# Altium PCB DCCBooster.PcbDoc
Units mil, origin at the board's own origin, x right, y up, seen from the top; angles counter-clockwise.
Board outline 6000 x 4000 mil, 2 copper layers (Top Layer, Bottom Layer); 45 components, 35 nets, 129 pads, 12 vias.
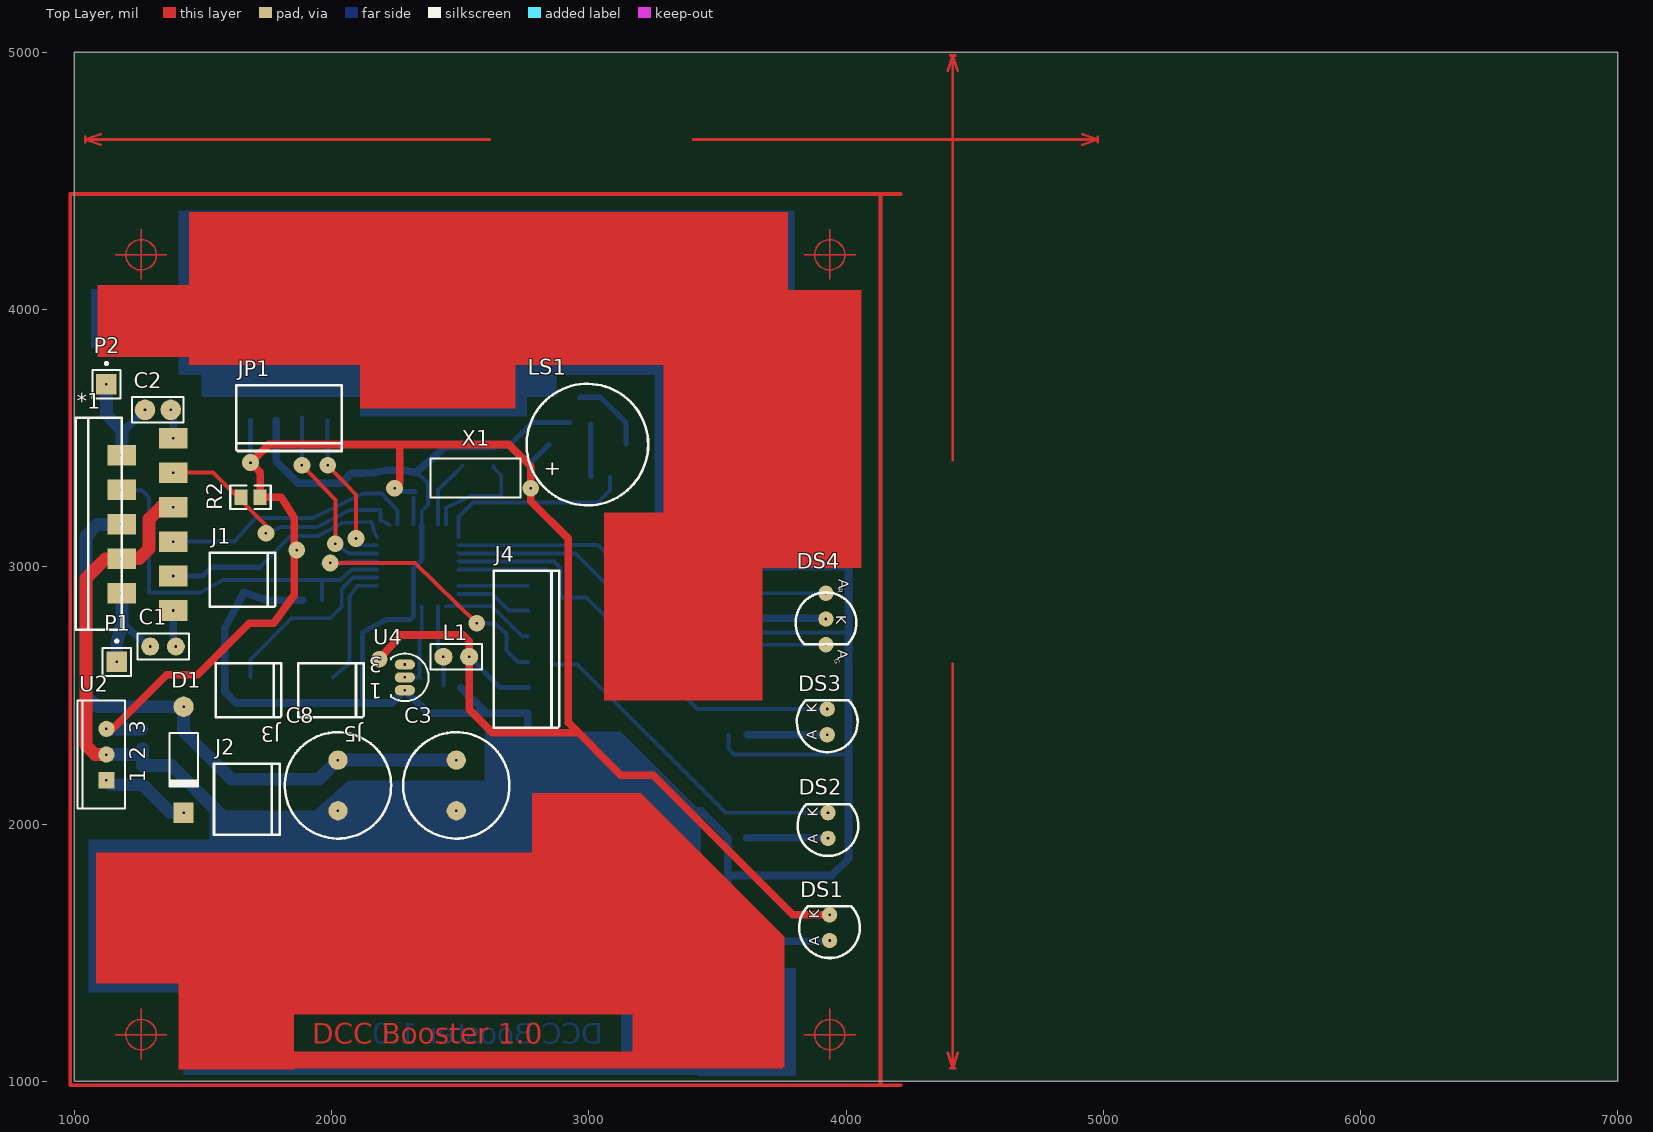
[diagram p0: Top Layer view]
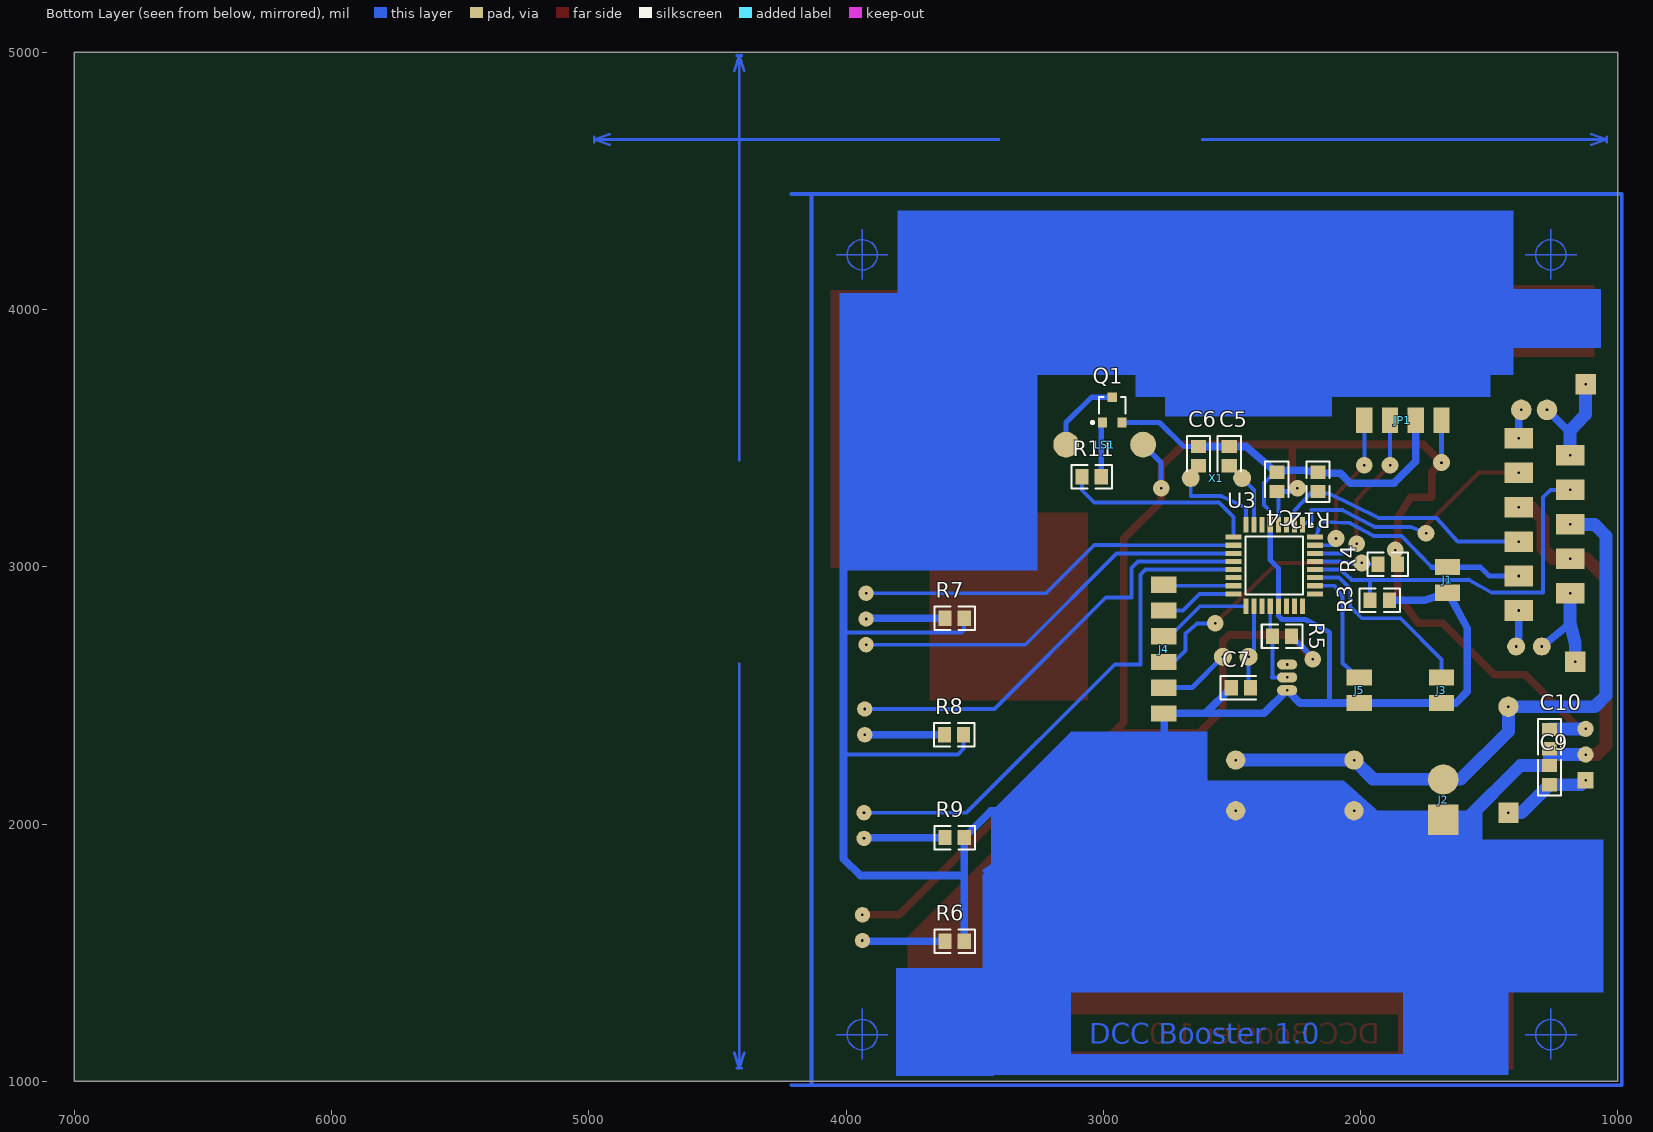
[diagram p1: Bottom Layer view, seen from below]

## Layer stack, top to bottom
Top Layer: signal copper 1.4
Dielectric: dielectric 12.6, FR-4, Dk 4.8
Bottom Layer: signal copper 1.4

## Board outline
1000,1000 7000,1000 7000,5000 1000,5000

## Design rules (kind name [scope] priority, off if disabled: settings)
Clearance [All] p1: gap=10
ComponentClearance [All] p1: gap=10 collisioncheckmode=0
PolygonConnect [All] p1: connectstyle=Relief reliefconductorwidth=10 reliefentries=4 polygonreliefangle="90 Angle"
RoutingLayers [All] p1: top layer=Horizontal bottom layer=Vertical
RoutingVias [All] p1: holewidth=28 width=50 viastyle="Through Hole" minholewidth=28 minwidth=50 maxholewidth=28 maxwidth=50
SolderMaskExpansion [All] p1: expansion=4
TestPointUsage [All] p1: valid=0 allowmultiple=FALSE
Testpoint [All] p1: side=15 testpointundercomponent=TRUE minsize=40 maxsize=100 preferedsize=60 minholesize=0 maxholesize=40 preferedholesize=32 testpointgrid=1 style=1023 order=-539222988
Width [All] p1: maxlimit=100 minlimit=15 preferedwidth=20 toplayer_prefwidth=30 bottomlayer_prefwidth=30 minimp=50.000000 maximp=50.000000 favimp=50.000000
16 further rules are at their usual default settings.

## Classes and differential pairs
component class DCCBooster: *1 C1 C2 C3 C4 C5 C6 C7 C8 C9 C10 D1 DS1 DS2 DS3 DS4 J1 J2 J4 JP1 L1 LS1 P1 P2 Q1 R2 R3 R4 R5 R6 R7 R8 R9 R11 R12 U2 U3 U4 X1

## Components (designator, comment, footprint, x,y, rotation, side; value= is the part's Value field where it differs from the comment)
*1 "LMD18200" TO220-11V 1385,2830 r90 top
C1 "Cap" RAD-0.1#1 1345,2690 r180 top
C2 "Cap" RAD-0.1#2 1325,3610 r0 top
C3 "Cap Pol1" RB5-10.5 2485,2150 r270 top
C4 "Cap" CC2012-0805 2325,3330 r270 bottom
C5 "Cap" CC2012-0805 2510,3430 r270 bottom
C6 "Cap" CC2012-0805 2630,3430 r270 bottom
C7 "Cap" CC2012-0805 2465,2530 r180 bottom
C8 "Cap Pol1" RB5-10.5 2025,2150 r270 top
C9 "Cap Pol1" CC2012-0805 1265,2190 r90 bottom
C10 "Cap Pol1" CC2012-0805 1265,2330 r270 bottom
D1 "Diode 1N4001" DIO10.46-5.3x2.8 1425,2250 r270 top
DS1 "Power" LED5mm 3936,1547 r90 top
DS2 "Current Overload" LED5mm 3930,1944 r90 top
DS3 "Thermal Overload" LED5mm 3927,2347 r90 top
DS4 "" "LED5mm TriColour" 3922,2797 r270 top
J1 "DCC Input" "0.1 SIP 2 PIN" 1562,3099 r180 top
J2 "10V Power In" "0.156 SIP 2 PIN" 1578,2329 r180 top
J3 "Overload Reset" "0.1 SIP 2 PIN" 1585,2670 r180 top
J4 "ISP Connector" "0.1 SIP 6 PIN" 2665,2630 r180 top
J5 "Manual Reset" "0.1 SIP 2 PIN" 1905,2670 r180 top
JP1 "RS232" "0.1 SIP 4 PIN" 1885,3670 r90 top
L1 "Inductor" RAD-0.1#1 2485,2650 r0 top
LS1 "Buzzer" "Mini PC Mount Piezo" 2845,3475 r0 top
P1 "Plug" PIN1 1165,2630 r0 top
P2 "Plug" PIN1 1125,3710 r0 top
Q1 "MMBT100A" 318-08 2965,3610 r180 bottom
R2 "Res2" CR2012-0805 1685,3270 r180 top
R3 "Res2" CR2012-0805 1925,2870 r0 bottom
R4 "Res2" CR2012-0805 1894,3010 r0 bottom
R5 "Res2" CR2012-0805 2305,2730 r180 bottom
R6 "Res2" CR2012-0805 3578,1544 r0 bottom
R7 "Res2" CR2012-0805 3578,2800 r0 bottom
R8 "Res2" CR2012-0805 3580,2347 r0 bottom
R9 "Res2" CR2012-0805 3578,1947 r0 bottom
R11 "Res1" R2012-0805 3045,3350 r180 bottom
R12 "PWM Pulldown" CR2012-0805 2165,3330 r270 bottom
U2 "LM7805CT" T03B 1125,2270 r90 top
U3 "AT90LS4433-4AC" 32A 2335,3005 r270 bottom
U4 "LM336BZ2.5" Z03A 2285,2570 r180 top
X1 "8MHz" RAD-0.2 2560,3345 r0 top
? "" Crosshair 1259.84,1181.1 r270 top
? "" Crosshair 3937.01,1181.1 r270 top
? "" Crosshair 3937.01,4212.6 r270 top
? "" Crosshair 1259.84,4212.6 r270 top

## Footprints (in the part's own frame and the unit in brackets; to place one, negate y for a bottom-side part, rotate by r counter-clockwise, add the part's x,y. Pads: shape width x height; smd on the part's side, far side on the other; paste and mask are expansions set on the pad)
"0.1 SIP 2 PIN" [mm] "0.1 SIP 2 PIN"
  rect 2.5x1.6 smd far side: 1(-2.54,5.08) 2(-2.54,2.54)
  silkscreen extent -5.59,1.14 0.89,6.48
"0.1 SIP 4 PIN" [mm] "0.1 SIP 4 PIN"
  rect 2.5x1.6 smd far side: 1(-2.54,5.08) 2(-2.54,2.54) 3(-2.54,0) 4(-2.54,-2.54)
  silkscreen extent -5.59,-3.94 0.89,6.48
"0.1 SIP 6 PIN" [mm] "0.1 SIP 6 PIN"
  rect 2.5x1.6 smd far side: 1(-2.54,5.08) 2(-2.54,2.54) 3(-2.54,0) 4(-2.54,-2.54) 5(-2.54,-5.08) 6(-2.54,-7.62)
  silkscreen extent -5.59,-9.02 0.89,6.48
"0.156 SIP 2 PIN" [mm]
  rect 3x3 smd far side: 1(-2.54,7.92)
  round 3 smd far side: 2(-2.54,3.96)
  silkscreen extent -5.59,2.41 0.89,9.4
32A [mm] "QFP; 32 Leads; Body 7 x 7 mm; Pitch 0.8 mm"
  rect 1.55x0.5 smd: 1(-4.025,2.8) 2(-4.025,2) 3(-4.025,1.2) 4(-4.025,0.4) 5(-4.025,-0.4) 6(-4.025,-1.2) 7(-4.025,-2) 8(-4.025,-2.8) 17(4.025,-2.8) 18(4.025,-2) 19(4.025,-1.2) 20(4.025,-0.4) 21(4.025,0.4) 22(4.025,1.2) 23(4.025,2) 24(4.025,2.8)
  rect 0.5x1.55 smd: 9(-2.8,-4.025) 10(-2,-4.025) 11(-1.2,-4.025) 12(-0.4,-4.025) 13(0.4,-4.025) 14(1.2,-4.025) 15(2,-4.025) 16(2.8,-4.025) 25(2.8,4.025) 26(2,4.025) 27(1.2,4.025) 28(0.4,4.025) 29(-0.4,4.025) 30(-1.2,4.025) 31(-2,4.025) 32(-2.8,4.025)
  silkscreen extent -4.12,-2.85 2.85,3.72
318-08 [mm] "SOT-23; 3 Leads; Body 3.0 x 2.6 mm, inc. leads (LxW max)"
  rect 0.9x0.95 smd: 1(-0.95,-1.25) 2(0.95,-1.25) 3(0,1.25)
  silkscreen extent -2.08,-1.37 1.3,1.25
CC2012-0805 [mm]
  rect 1.3x1.5 smd: 1(-0.95,0) 2(0.95,0)
  silkscreen extent -2,-1.15 1.5,1.15
CR2012-0805 [mm]
  rect 1.3x1.5 smd: 1(-0.95,0) 2(0.95,0)
  silkscreen extent -2,-1.15 2,1.15
Crosshair [mil] "Mounting Hole pad"
  Multi-Layer circle w5: c0,0 r59.06
  Multi-Layer lines w5: 0,-100 0,100 ; 95,0 -100,0
DIO10.46-5.3x2.8 [mm]
  round 2 hole 0.254: 1(-5.23,0)
  rect 2x2 hole 0.254: 2(5.23,0)
  silkscreen extent -2.65,-1.41 2.75,1.4
LED5mm [mil] "LED 5mm through hole"
  round 60 hole 10: 1(100,0) 2(0,0)
  silkscreen extent -68,-118 134,118
"LED5mm TriColour" [mil]
  round 60 hole 10: 1(100,0) 2(0,0) 3(-100,0)
  silkscreen extent -103,-118 99,118
"Mini PC Mount Piezo" [mil]
  round 100 smd far side: 1(0,0) 2(299.21,0)
  silkscreen extent -86,-236 386,236
PIN1 [mil]
  rect 80x80 hole 10: 1(0,0)
  silkscreen extent -55,-55 55,86
R2012-0805 [mm]
  rect 1.3x1.5 smd: 1(-0.95,0) 2(0.95,0)
  silkscreen extent -2,-1.15 2,1.15
RAD-0.1#1 [mil]
  round 70 hole 10: 1(-50,0) 2(50,0)
  silkscreen extent -100,-50 100,50
RAD-0.1#2 [mil]
  round 80 hole 10: 1(-50,0) 2(50,0)
  silkscreen extent -100,-50 100,50
RAD-0.2 [mil]
  round 70 smd far side: 1(-100,0) 2(100,0)
  silkscreen extent -175,-75 175,75
RB5-10.5 [mil]
  round 75 hole 10: 1(-98.43,0) 2(98.43,0)
  silkscreen extent -207,-207 207,207
T03B [mm] "TO, Thru-Hole, Vertical, Heatsink Mounted; 3 In-Line Leads; Pitch 2.54 mm"
  rect 1.6x1.6 hole 0.254: 1(-2.54,0)
  round 1.6 hole 0.254: 2(0,0) 3(2.54,0)
  silkscreen extent -5.35,-1.85 5.35,2.85
TO220-11V [mil]
  rect 80x110 hole 10: 1(0,0) 2(67,200) 3(134,0) 4(201,200) 5(268,0) 6(335,200) 7(402,0) 8(469,200) 9(536,0) 10(603,200) 11(670,0)
  silkscreen extent -75,200 750,380
Z03A [mm] "TO, Flat Index; 3 In-Line, Axial Leads; Body Dia. 4.6mm; Leads 0.53 x 0.39 mm (max)"
  oval 2x1 hole 0.254: 1(0,1.27) 2(0,0) 3(0,-1.27)
  silkscreen extent -2.34,-2.34 1.35,2.34

## Part data
C1 C2 C4 C5 C6 C7: "Capacitor"
C3: library part Cap, "Capacitor"
C8 C9 C10: "Polarized Capacitor (Radial)"
D1: "1 Amp General Purpose Rectifier"
DS1 DS2 DS3: library part LED0, "Typical INFRARED GaAs LED"
DS4: library part "LED Tricolour", "Typical Red Green Tri Color LED"
J1 J2 J3 J5: library part "SIP2 CONNECTOR"
JP1: library part "Header 4", "Header, 4-Pin"
LS1: "Magnetic Transducer Buzzer"
Q1: "General Purpose Amplifier NPN Silicon"
R2 R3 R4 R5 R6 R7 R8 R9 R11: "Resistor"
R12: library part Res2, "Resistor"
U2: "Series 3-Terminal Positive Regulator"
U3: "8-Bit AVR Microcontroller with 4K Bytes of In-System Programmable Flash Memory"
U4: "Reference Diode"
X1: library part XTAL, "Crystal Oscillator"

## Via types
v1: diameter 65, hole 10, Top Layer to Bottom Layer, 12 vias

## Nets (pads, with @x,y where several pads share a name; then routed paths per layer and width w, separated by ;. In a path a pad name is that pad's centre, name@x,y a point inside that pad or via, vN(x,y) a via of type N, cw(c..) or ccw(c..) an arc to the next point about the centre after c; other vN are vias at no path point)
GND: *1.4 *1.7 C3.2 C4.1 C5.1 C6.1 C7.1 C8.2 C9.2 C10.2 J1.1 J2.1 J3.1 J4.1 J5.1 JP1.2 Q1.2 R3.1 R6.1 R7.1 R8.1 R9.1 R12.1 U2.2 U3.5 U3.21 U4.1 | length 12033.6
  Top Layer w50: U2.2 1080,2270 1045,2305 1045,2955 1121,3031 *1.4 1251,3031 1290,3070 1290,3185 1337,3232 *1.7
  Bottom Layer w15: C4.1@2325,3365 2352.6,3347.4 2375,3325 2375,3240 2350.75,3215.75 U3.5 ; R7.1 3540.6,2754.4 3550,2745 4010,2745 ; R8.1 3542.6,2292.6 3565,2270.2 4009.8,2270.2
  Bottom Layer w20: 2120,2470 2120,2745 2215,2795 2305,2795 2319.25,2809.25 2319.25,2994.25 2350.75,3025.75 U3.5 ; C6.1 2687.4,3467.4 2780.79,3560.79 Q1.2
  Bottom Layer w30: JP1.2 1785,3410 1870,3325 2040,3325 2077.4,3362.4 2165,3365 2215,3375 2285,3375 2325,3365 2445,3467.4 C6.1 ; R3.1 1750,2870 1660,2900 1585,2761 1585,2515 1630,2470 2235,2470 U4.1 2375,2430 2762.6,2430 2765,2051.57 3436.02,2051.57 R9.1 R6.1 ; C7.1 2602.4,2430 ; 3540.6,1800 3945,1800 4010,1865 4010,3125
  Bottom Layer w50: U2.2 C10.2@1260,2270 ; C10.2 C9.2 1377.6,2227.4 1586.81,2018.19 1685,2018.19 1991.61,2018.19 C8.2 2765,2051.57
Net*1_1: *1.1 C1.1 | length 142.4
  Bottom Layer w30: *1.1 1385,2710 C1.1
Net*1_2: *1.2 C1.2 P1.1 | length 411.6
  Bottom Layer w30: 1185,2780 C1.2
  Bottom Layer w50: P1.1 1165,2700 1185,2780 *1.2
Net*1_3: *1.3 J1.2 U3.32 | length 912.6
  Bottom Layer w15: 1722,2998 1840,3120 1950,3120 2040,3170 2155,3175 2165,3140 U3.32
  Bottom Layer w20: *1.3 1499,2964 1533,2998 1722,2998
Net*1_5: *1.5 R12.2 U3.2 | length 1018.3
  Bottom Layer w15: *1.5 1622,3098 1705,3190 1930,3190 2125,3285 2195,3285 2256.26,3218.74 U3.2
Net*1_8: *1.8 R3.2 U3.28 | length 1474
  Bottom Layer w15: *1.8 1261,3299 1290,3270 1290,3045 1290,2900 1490,2900 1580,2950 ; 1580,2948 2035,2948 ; R3.2 1962.4,2942.6 ; 2035,2950 2079.25,2989.25 U3.28
Net*1_9: *1.9 R2.2 U3.1 | length 1019.7
  Top Layer w15: *1.9 1539,3366 1745,3160 v1(1745,3130)
  Bottom Layer w15: v1(1745,3130) 1805,3155 1945,3155 2070,3220 2190,3220 2190,3180 U3.1
Net*1_10: *1.10 C2.1 P2.1 | length 418.6
  Bottom Layer w30: 1185,3520 C2.1
  Bottom Layer w50: P2.1 1125,3591.8 1185,3530 ; *1.10 1185,3520
Net*1_11: *1.11 C2.2 | length 114.1
  Bottom Layer w30: C2.2 1385,3600 *1.11
NetC5_2: C5.2 U3.7 X1.1 | length 270.4
  Bottom Layer w15: U3.7 2413.74,3298.74 X1.1 2462.4,3345 C5.2
NetC6_2: C6.2 U3.8 X1.2 | length 421.7
  Bottom Layer w15: U3.8 2445,3230 2540,3275 2660,3275 2660,3355 2630,3385 C6.2
NetC7_2: C7.2 L1.1 U3.18 | length 317.9
  Bottom Layer w15: U3.18 2413.74,2671.26 L1.1 C7.2@2435,2537.4
NetC9_1: C9.1 D1.2 U2.1 | length 352.2
  Bottom Layer w50: U2.1 1142.4,2152.6 C9.1 1373.5,2044.09 D1.2
NetDS1_2: DS1.2 R6.2 | length 321.8
  Bottom Layer w30: R6.2 3933,1544 DS1.2
NetDS2_1: DS2.1 U3.13 | length 2033.1
  Bottom Layer w15: U3.13 2835.75,2989.25 2855,2970 2855,2620 2955,2620 3531,2044 DS2.1
NetDS2_2: DS2.2 R9.2 | length 311.6
  Bottom Layer w30: R9.2 DS2.2@3927,1947
NetDS3_1: DS3.1 U3.12 | length 1738.6
  Bottom Layer w15: U3.12 2864.25,3020.75 2890,2995 2890,2880 2990,2880 3423,2447 DS3.1
NetDS3_2: DS3.2 R8.2 | length 309.6
  Bottom Layer w30: R8.2 DS3.2
NetDS4_1: DS4.1 U3.11 | length 1575.7
  Bottom Layer w15: U3.11 2947.76,3052.24 3303,2697 DS4.1
NetDS4_2: DS4.2 R7.2 | length 303.6
  Bottom Layer w30: R7.2 DS4.2@3919,2800
NetDS4_3: DS4.3 U3.10 | length 1506.4
  Bottom Layer w15: U3.10 2935,3085 3035,3085 3223,2897 DS4.3
NetJ3_2: J3.2 U3.27 | length 734.2
  Bottom Layer w15: J3.2 1685,2640 1845,2800 1995,2800 2040,2845 2040,2915 2082.76,2957.76 U3.27
NetJ4_3: J4.3 R4.2 U3.29 | length 1249.4
  Top Layer w15: v1(1995,3015) 2325,3015 v1(2565,2780)
  Bottom Layer w15: 1962.4,3010 2030,3010 v1(1995,3015) 2078.35,3020.75 U3.29 ; v1(2565,2780) 2635,2780 2680,2740 2680,2675 2725,2630 J4.3
NetJ4_4: J4.4 U3.17 | length 368
  Bottom Layer w15: U3.17 2623.46,2846.54 2740,2730 J4.4
NetJ4_5: J4.5 U3.16 | length 298.4
  Bottom Layer w15: U3.16 2625.24,2894.76 2690,2830 J4.5
NetJ4_6: J4.6 U3.15 | length 267.8
  Bottom Layer w15: U3.15 J4.6@2761.26,2926.26
NetJ5_2: J5.2 U3.26 | length 472.2
  Bottom Layer w15: J5.2 2070,2625 2070,2885 2101.26,2926.26 U3.26
NetJP1_3: JP1.3 U3.30 | length 716.1
  Top Layer w15: v1(1885,3395) 2015,3260 v1(2015,3090)
  Bottom Layer w15: v1(1885,3395) JP1.3@1885,3580 ; v1(2015,3090) 2067.76,3052.24 U3.30
NetJP1_4: JP1.4 U3.31 | length 579.4
  Top Layer w15: v1(1985,3395) 2095,3280 v1(2095,3110)
  Bottom Layer w15: v1(1985,3395) JP1.4 ; v1@2101.26,3083.74 U3.31
NetLS1_2: LS1.2 Q1.3 | length 305.8
  Bottom Layer w20: Q1.3 3045.79,3659.21 3144.21,3560.79 LS1.2
NetQ1_1: Q1.1 R11.2 | length 205.6
  Bottom Layer w20: R11.2 Q1.1@3007.6,3555.59
NetR5_1: R5.1 U3.20 U4.2 | length 329.3
  Bottom Layer w15: U4.2 2345,2570 2342.4,2572.6 R5.1 ; R5.1@2350.75,2738.35 U3.20
NetR11_1: R11.1 U3.9 | length 762.8
  Bottom Layer w15: U3.9 2493.46,3193.46 2550,3250 3035,3250 3082.4,3297.4 R11.1
VCC: C4.2 C10.1 DS1.1 J4.2 JP1.1 L1.2 LS1.1 R2.1 R4.1 R5.2 U2.3 U3.4 | length 7585.1
  Top Layer w30: U2.3 1150,2370 1360,2580 1480,2580 1680,2780 1775,2780 1855,2890 1855,3190 1805,3270 R2.1 1722.4,3367.6 v1(1685,3405) 1755,3475 2690,3475 2775,3390 2775,3255 2920,3110 2920,2395 3125,2190 3250,2190 3793,1647 DS1.1 ; v1(2185,2640) 2270,2735 2510,2735 2535,2710 2535,2445 2625.8,2354.2 2960.8,2354.2 ; v1(2245,3305) 2265,3325 2265,3475
  Bottom Layer w15: U3.4 2319.25,3266.85
  Bottom Layer w20: v1(1685,3405) JP1.1 ; R4.1@1857.6,3010 1857.6,3067.4 v1(1865,3065) ; v1(2185,2640) 2210,2672.4 R5.2 ; v1(2245,3305) 2257.4,3292.6 C4.2 ; L1.2 2655,2530 J4.2 ; v1(2775,3305) 2775,3405 LS1.1
  Bottom Layer w50: U2.3 C10.1@1262.4,2370
VSS: *1.6 C3.1 C8.1 D1.1 J2.2 | length 2440.6
  Bottom Layer w50: *1.6 1090,3165 1045,3120 1045,2500 1089.09,2455.91 D1.1 1425,2360 1610.91,2174.09 1950.67,2174.09 C8.1 C3.1
pads on no net: U3.3 U3.6 U3.14 U3.19 U3.22 U3.23 U3.24 U3.25 U4.3

## Other copper
Top Layer:
  rectangle: 1085,1380 3325,1890
  rectangle: 1405,1045 1855,1450
  rectangle: 3170,1055 3760,1560
  rectangle: 1775,1050 3755,1115
  rectangle: 3060,2480 3675,3210
  rectangle: 3290,2995 4060,4075
  rectangle: 1445,3785 3775,4380
  rectangle: 2110,3615 2715,3860
  rectangle: 1770,1260 3285,1450
  rectangle: 2780,1700 3205,2120
  region: 2886.16,1793.84 3440,1240 3760.89,1560.89 3207.05,2114.72
  rectangle: 1090,3815 1570,4095
  text "DCC Booster 1.0" at 1925,1145 h80
Bottom Layer:
  rectangle net GND: 1055,1345 3315,1940
  region net GND: 3226.28,1806.11 3385,1695 3472.23,1819.62 3313.51,1930.73
  rectangle net GND: 3125,1085 3470,1805
  rectangle net GND: 1425,1080 1835,1380
  rectangle net GND: 1425,1025 3470,1105
  rectangle net GND: 3425,1020 3805,1440
  rectangle net GND: 3255,2985 4025,4065
  rectangle net GND: 1405,3745 3800,4385
  rectangle net GND: 1495,3660 2875,3885
  rectangle net GND: 2110,3585 2760,3750
  rectangle net GND: 1065,3850 1485,4080
  rectangle net GND: 1525,1840 3436.02,2051.57
  rectangle net GND: 2065,1890 3085,2170
  region net GND: 2043.82,1870.21 2204.52,2013.04 2065,2170 1904.31,2027.16
  rectangle net GND: 2595,2085 3125,2360
  region net GND: 2913.9,2153.9 3234.19,1833.62 3442.78,2042.22 3122.5,2362.5
  text "DCC Booster 1.0" at 3055,1145 h80
Multi-Layer:
  lines w10: 1042.43,4650.99 1042.43,4670.99 ; 1102.43,4640.99 1042.43,4660.99 ; 1102.43,4680.99 1042.43,4660.99 ; 2615.05,4660.99 1042.43,4660.99 ; 3406.81,4660.99 4979.44,4660.99 ; 4395,1110.56 4415,1050.56 ; 4395,4927.57 4415,4987.57 ; 4405,1050.56 4425,1050.56 ; 4405,4987.57 4425,4987.57 ; 4415,2623.19 4415,1050.56 ; 4415,3414.95 4415,4987.57 ; 4435,1110.56 4415,1050.56 ; 4435,4927.57 4415,4987.57 ; 4919.44,4640.99 4979.44,4660.99 ; 4919.44,4680.99 4979.44,4660.99 ; 4979.44,4650.99 4979.44,4670.99
  lines w15: 4133.86,984.25 4133.86,4448.82 ; 4212.6,984.25 984.25,984.25 984.25,4448.82 4212.6,4448.82
  text "3937.008 (mil)" at 2625.05,4625 h60
  text "3937.008 (mil)" at 4450.99,2633.19 h60 r90

## Text inside footprints (layer, text, board x,y; h text height)
DS1: Top Overlay "K" at 3896,1632 h39.37 r90; Top Overlay "A" at 3896,1527 h39.37 r90
DS2: Top Overlay "K" at 3890,2029 h39.37 r90; Top Overlay "A" at 3890,1924 h39.37 r90
DS3: Top Overlay "K" at 3887,2432 h39.37 r90; Top Overlay "A" at 3887,2327 h39.37 r90
DS4: Top Overlay "A" at 3967,2677 h39.37 r270; Top Overlay "K" at 3962,2812 h39.37 r270; Top Overlay "A" at 3972,2952 h39.37 r270; Top Overlay "G" at 3957,2642 h20.37 r270; Top Overlay "R" at 3967,2917 h20.37 r270
LS1: Top Overlay "+" at 2825,3355 h60
U2: Top Overlay "3" at 1275.59,2350.32 h59.06 r90; Top Overlay "1" at 1275.59,2160.16 h59.06 r90; Top Overlay "2" at 1275.59,2250.32 h59.06 r90
U4: Top Overlay "1" at 2197.44,2547.95 h59.05 r180; Top Overlay "3" at 2197.44,2650.12 h59.05 r180